# Altium PCB 8SoundsUSB.PcbDoc (part 2 of 3)
Units mm, origin at the board's own origin, x right, y up, seen from the top; angles counter-clockwise.
Board outline 126.1 x 74.1 mm, 4 copper layers (Top Layer, GND PLANE, POWER PLANE, Bottom Layer); 415 components, 227 nets, 1234 pads, 311 vias.
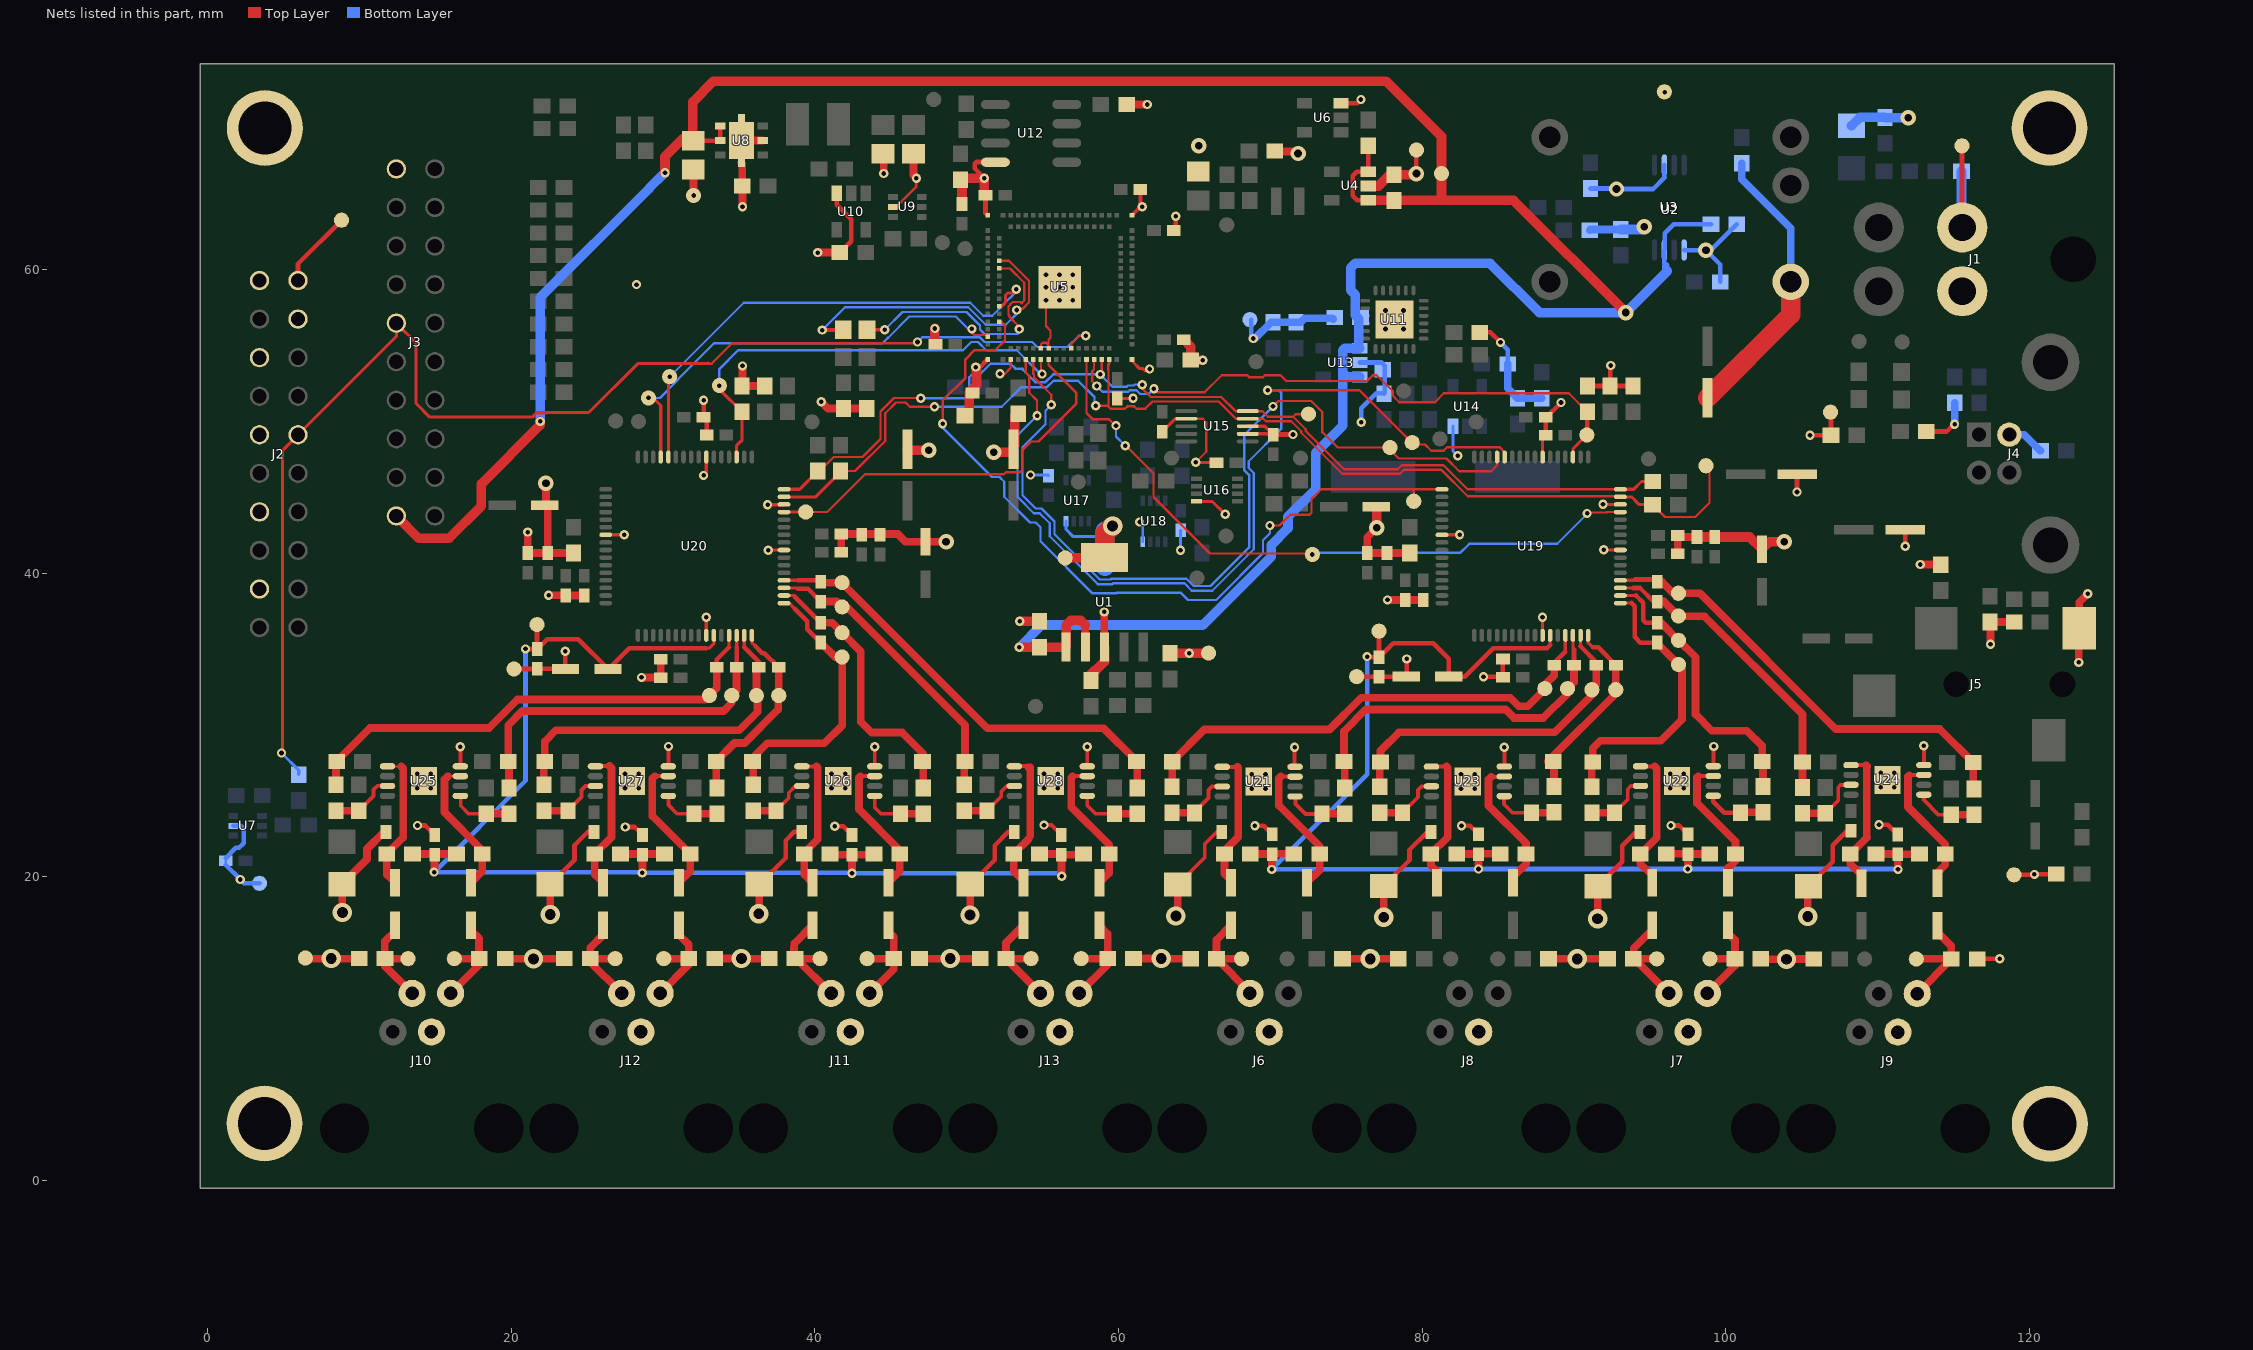
[diagram p4: the nets of this part, all layers, seen from the top]

## Via types
v1: diameter 0.61, hole 0.305, Top Layer to Bottom Layer, 227 vias
v2: diameter 0.406, hole 0.305, Top Layer to Bottom Layer, 32 vias
v3: diameter 1.27, hole 0.711, Top Layer to Bottom Layer, 27 vias
v4: diameter 1.016, hole 0.508, Top Layer to Bottom Layer, 20 vias
v5: diameter 0.66, hole 0.33, Top Layer to Bottom Layer, tented top, 4 vias
v6: diameter 0.61/0.61 (per signal layer), hole 0.305, Top Layer to Bottom Layer, 1 vias

## Nets (pads, with @x,y where several pads share a name; then routed paths per layer and width w, separated by ;. In a path a pad name is that pad's centre, name@x,y a point inside that pad or via, vN(x,y) a via of type N, cw(c..) or ccw(c..) an arc to the next point about the centre after c; other vN are vias at no path point) (continued)
+5V: C1.2 C10.2 C14.2 C30.2 J3.1 R9.1 R13.1 TP44.1 U1.1 U1.2 U3.7 U4.1 U4.3 U8.4 U8.5 U13.1 U13.3 | length 203.8
  Top Layer w0.305: C14.2@31.979,68.514 U8.5@33.746,68.514 ; U8.5@33.752,68.516 U8.4@33.752,69.466 ; U4.1@76.452,64.575 75.735,64.575 75.438,64.872 75.438,66.206 75.707,66.475 U4.3@76.452,66.475 R13.1@76.452,68.175 ; U8.5@33.746,68.514 33.748,68.512 33.757,68.504 U8.5@33.746,68.514
  Top Layer w0.508: U1.2@57.81,35.153 57.81,36.601 ; C14.2@31.979,68.651 32.047,68.583 32.101,68.529 C14.2@31.979,68.651
  Top Layer w0.635: J3.1@12.421,43.79 13.894,42.316 15.9,42.316 18.02,44.436 18.02,45.896 21.895,49.77 v1(21.895,50.013) ; v1(30.124,66.396) 30.124,67.462 31.318,68.656 C14.2@31.953,68.656 ; C14.2@31.953,68.631 C14.2@31.953,68.656 ; C14.2@31.979,68.656 C14.2@31.953,68.656 ; v1(53.467,35.128) 54.775,35.128 C1.2@54.79,35.143 U1.1@56.55,35.143 56.55,36.586 56.871,36.906 57.506,36.906 57.81,36.601 ; U4.1@76.452,64.575 C10.2@78.152,64.575 86.031,64.575 v4(93.421,57.184) ; 81.28,64.575 TP44.1@81.28,66.345 81.28,68.783 77.648,72.415 33.299,72.415 31.953,71.069 C14.2@31.953,68.656
  Bottom Layer w0.254: U3.7@95.965,61.309 U3.7@95.987,61.33
  Bottom Layer w0.305: U3.7@95.965,61.309 95.965,60.422 96.164,60.223 ; U3.7@95.987,61.33 95.987,62.409 96.587,63.009 R9.1@99.04,63.009 ; C30.2@75.84,56.768 75.89,56.718 C30.2@75.84,56.768
  Bottom Layer w0.508: 96.063,59.978 96.063,60.274
  Bottom Layer w0.635: v1(21.895,50.013) 21.895,58.166 29.083,65.354 29.083,65.38 30.099,66.396 v1(30.124,66.396) ; v1(53.467,35.128) 54.94,36.601 65.558,36.601 70.066,41.109 70.066,41.872 71.171,42.977 71.171,43.739 73,45.568 73,47.955 74.778,49.733 74.778,53.196 ; U13.3@75.89,52.943 75.05,52.943 75.04,52.934 74.778,53.196 ; 96.164,59.927 v4(93.421,57.184) 87.723,57.184 84.48,60.427 75.59,60.427 75.298,60.134 75.298,58.661 75.59,58.369 C30.2@75.59,57.018 ; 74.778,53.196 74.778,54.712 74.909,54.843 U13.1@75.89,54.843 75.84,54.893 C30.2@75.84,56.768 ; C30.2@75.59,57.018 C30.2@75.84,56.768 ; C30.2@75.59,57.018 C30.2@75.84,56.768
ADC0_AIN1_N: C93.2 R68.1 R78.1 TP1.1 U19.45 | length 32.9
  Top Layer w0.203: 89.433,34.849 89.433,35.911 U19.45@89.44,35.918
  Top Layer w0.305: C93.2@88.707,33.96 88.69,33.977 88.69,34.106 89.433,34.849
  Top Layer w0.508: R78.1@63.532,25.936 R68.1@63.532,27.592 ; R68.1@63.608,27.592 R68.1@63.532,27.592 ; C93.2@88.707,33.96 88.707,33.274 88.087,32.654 TP1.1@88.087,32.41 88.087,32.37 86.959,31.242 86.37,31.242 85.811,31.801 75.986,31.801 73.903,29.718 65.658,29.718 R68.1@63.532,27.592
ADC0_AIN1_P: C93.1 R70.1 R80.1 TP5.1 U19.46 | length 24
  Top Layer w0.203: U19.46@89.94,35.918 89.94,35.053 90.007,34.986
  Top Layer w0.305: 89.992,35.001 90.007,34.986 C93.1@90.007,33.96
  Top Layer w0.508: R80.1@74.91,25.859 74.91,27.559 R70.1@74.86,27.609 74.86,29.598 76.302,31.039 85.496,31.039 86.055,30.48 87.986,30.48 89.586,32.08 TP5.1@89.586,32.41 90.007,32.832 C93.1@90.007,33.96
ADC0_AIN2_N: C105.2 R84.1 R94.1 TP11.1 U19.47 | length 22.3
  Top Layer w0.203: U19.47@90.44,35.918 90.44,35.2 90.442,35.197
  Top Layer w0.305: 90.442,35.197 90.507,35.133 90.636,35.004 90.701,34.939 91.217,34.423 91.476,34.164 C105.2@91.476,33.96
  Top Layer w0.508: R94.1@77.211,25.934 77.211,27.534 R84.1@77.261,27.584 77.261,28.316 78.486,29.54 88.748,29.54 91.186,31.979 TP11.1@91.186,32.334 91.476,32.624 C105.2@91.476,33.96
ADC0_AIN2_P: C105.1 R86.1 R96.1 TP9.1 U19.48 | length 19.6
  Top Layer w0.203: U19.48@90.943,35.916 U19.48@90.94,35.918 90.94,35.425 91.237,35.128
  Top Layer w0.305: 91.237,35.128 91.607,35.128 C105.1@92.776,33.96
  Top Layer w0.508: R86.1@88.636,27.609 88.686,27.559 R96.1@88.686,25.959 ; R86.1@88.707,27.609 R86.1@88.29,27.609 ; C105.1@92.776,33.96 92.761,33.945 TP9.1@92.761,32.334 TP9.1@92.761,32.08 ; R86.1@88.29,27.609 88.463,27.783 TP9.1@92.761,32.08 ; R86.1@88.29,27.609 TP9.1@92.761,32.08
ADC0_AIN3_N: C94.2 R69.1 R79.1 TP16.1 U19.49 | length 19.6
  Top Layer w0.203: U19.49@93.065,38.043 93.796,38.043 93.802,38.049
  Top Layer w0.305: 93.802,38.049 94.005,37.846 94.005,35.814 94.376,35.443 C94.2@95.49,35.443
  Top Layer w0.508: R79.1@91.187,25.934 R69.1@91.187,27.534 ; R69.1@91.237,27.584 91.237,28.474 91.745,28.981 95.733,28.981 97.13,30.378 97.13,33.754 95.49,35.393 C94.2@95.49,35.443
ADC0_AIN3_P: C94.1 R71.1 R81.1 TP14.1 U19.50 | length 19.2
  Top Layer w0.203: U19.50@93.065,38.543 93.068,38.546 94.096,38.546
  Top Layer w0.305: 94.096,38.546 94.564,38.077 94.564,36.906 94.727,36.743 C94.1@95.49,36.743
  Top Layer w0.508: C94.1@95.49,36.743 95.74,36.743 TP14.1@96.89,35.593 ; TP14.1@97,35.484 TP14.1@96.89,35.593 ; R81.1@102.462,25.959 102.462,27.559 R71.1@102.412,27.609 102.412,28.626 101.397,29.642 99.085,29.642 98.019,30.709 98.019,34.468 96.893,35.593 TP14.1@96.89,35.593
ADC0_AIN4_N: C106.2 R85.1 R95.1 TP21.1 U19.51 | length 20.3
  Top Layer w0.203: U19.51@93.065,39.043 93.069,39.04 93.904,39.04
  Top Layer w0.305: 93.904,39.04 94.361,39.04 95.258,38.143 C106.2@95.49,38.143
  Top Layer w0.508: C106.2@95.49,38.143 95.94,38.143 96.898,37.186 98.603,37.186 105.067,30.722 R85.1@105.067,27.583 105.062,27.578 R95.1@105.062,25.895
ADC0_AIN4_P: C106.1 R87.1 R97.1 TP19.1 U19.52 | length 30
  Top Layer w0.203: U19.52@93.065,39.543 93.07,39.548 93.955,39.548 94.005,39.599
  Top Layer w0.305: 94.005,39.599 95.335,39.599 C106.1@95.49,39.443
  Top Layer w0.508: C106.1@95.49,39.443 95.803,39.443 96.553,38.693 TP19.1@96.89,38.693 98.314,38.693 107.264,29.743 114.113,29.743 R87.1@116.312,27.545 116.312,25.845 R97.1@116.362,25.795
ADC0_SD1: TP4.1 U5.A40 U19.13 | length 57.8
  Top Layer w0.152: U5.A40@54.39,54.093 54.381,54.084 54.381,53.157 54.432,53.106 54.432,52.916 55.575,51.773 v1(55.575,51.105) ; v1(70.18,51.003) 70.536,51.359 72.695,51.359 73.431,50.622 73.431,49.301 74.44,48.293 TP4.1@77.89,48.293 77.89,48.144 78.461,47.574 81.61,47.574 82.448,46.736 84.557,46.736 84.94,47.12 U19.13@84.94,47.668
  Bottom Layer w0.152: v1(55.575,51.105) 55.189,50.718 55.189,49.829 53.67,48.311 53.67,45.151 54.549,44.272 54.93,44.272 55.778,43.424 55.778,42.578 58.758,39.599 59.474,39.599 59.524,39.649 64.473,39.649 64.955,39.167 66.058,39.167 68.605,41.714 68.605,46.49 68.275,46.821 68.275,49.098 v1(70.18,51.003)
ADC0_SD2: TP8.1 U5.A39 U19.12 | length 59.8
  Top Layer w0.152: U5.A39@53.89,54.093 53.89,53.216 54.119,52.988 54.119,51.901 54.559,51.46 54.585,51.46 54.635,51.41 v1(54.635,50.394) ; v1(69.825,52.07) 75.871,52.07 79.325,48.616 TP8.1@79.35,48.616 79.472,48.493 80.19,48.493 80.601,48.082 81.421,48.082 81.661,48.322 85.097,48.322 85.44,47.979 U19.12@85.44,47.668
  Bottom Layer w0.152: v1(54.635,50.394) 53.34,49.098 53.34,45.051 54.423,43.967 54.804,43.967 55.474,43.298 55.474,42.452 58.632,39.294 59.6,39.294 59.651,39.345 64.347,39.345 64.829,38.862 66.184,38.862 68.91,41.588 68.91,46.617 68.58,46.947 68.58,47.389 70.714,49.522 70.714,51.918 70.561,52.07 v1(69.825,52.07)
ADC1_AIN1_N: C117.2 R100.1 R110.1 TP31.1 U20.45 | length 32.4
  Top Layer w0.203: 34.341,35.128 U20.45@34.34,35.918
  Top Layer w0.305: C117.2@33.538,33.807 33.538,34.326 34.341,35.128
  Top Layer w0.508: R110.1@8.44,26.068 R100.1@8.44,27.567 ; R100.1@8.49,27.618 10.692,29.82 18.531,29.82 20.411,31.699 32.791,31.699 33.538,32.446 C117.2@33.538,33.807
ADC1_AIN1_P: C117.1 R102.1 R112.1 TP33.1 U20.46 | length 24
  Top Layer w0.203: U20.46@34.84,35.918 34.849,35.91 34.849,35.154
  Top Layer w0.305: C117.1@34.838,33.807 34.849,33.818 34.849,35.154
  Top Layer w0.508: R102.1@19.79,27.618 19.79,30.001 20.726,30.937 33.985,30.937 34.519,31.471 TP33.1@34.519,31.953 34.838,32.273 C117.1@34.838,33.807 ; R112.1@19.84,25.868 R102.1@19.84,27.531
ADC1_AIN2_N: C129.2 R116.1 R126.1 TP36.1 U20.47 | length 23.2
  Top Layer w0.203: U20.47@35.34,35.918 35.34,35.145 35.357,35.128
  Top Layer w0.305: 35.357,35.128 36.307,34.178 C129.2@36.307,33.807
  Top Layer w0.508: R126.1@22.14,26.068 R116.1@22.14,27.551 ; R116.1@22.19,27.618 22.19,28.921 22.936,29.667 35.001,29.667 36.22,30.886 36.22,31.877 TP36.1@36.144,31.953 36.144,33.645 C129.2@36.307,33.807
ADC1_AIN2_P: C129.1 R118.1 R128.1 TP35.1 U20.48 | length 13.2
  Top Layer w0.203: U20.48@35.84,35.918 35.84,35.435 36.057,35.219
  Top Layer w0.305: 36.057,35.219 36.535,34.741 36.674,34.741 C129.1@37.607,33.807
  Top Layer w0.508: C129.1@37.607,33.807 37.617,33.797 TP35.1@37.617,31.953 37.592,31.928 37.592,31.039 35.382,28.829 34.701,28.829 R118.1@33.49,27.618 R128.1@33.49,25.869 ; R128.1@33.49,25.869 33.516,25.844 33.579,25.781 R128.1@33.49,25.869
ADC1_AIN3_N: C118.2 R101.1 R111.1 TP38.1 U20.49 | length 18.7
  Top Layer w0.203: U20.49@37.965,38.043 38.3,38.043 38.667,37.676
  Top Layer w0.305: 38.667,37.676 39.505,36.838 39.505,36.328 C118.2@40.39,35.443
  Top Layer w0.508: R111.1@35.94,26.068 35.94,27.568 R101.1@35.89,27.618 35.89,27.839 36.855,28.804 40.615,28.804 41.79,29.979 TP38.1@41.79,34.493 41.34,34.493 C118.2@40.39,35.443
ADC1_AIN3_P: C118.1 R103.1 R113.1 TP37.1 U20.50 | length 20.7
  Top Layer w0.203: U20.50@37.965,38.543 38.597,38.543 38.659,38.481
  Top Layer w0.305: 38.659,38.481 38.659,38.475 C118.1@40.39,36.743
  Top Layer w0.508: C118.1@40.39,36.743 41.14,36.743 TP37.1@41.79,36.093 43.028,34.856 43.028,30.226 43.739,29.515 45.745,29.515 47.14,28.12 ; 47.14,28.12 47.14,27.618 R113.1@47.14,25.868 47.14,28.12
ADC1_AIN4_N: C130.2 R117.1 R127.1 TP40.1 U20.51 | length 19.7
  Top Layer w0.203: 38.887,38.989 38.834,39.042 U20.51@38.018,39.042 ; U20.51@38.018,39.042 37.992,39.017 37.965,38.99 U20.51@38.018,39.042
  Top Layer w0.305: 38.887,38.989 39.545,38.989 C130.2@40.39,38.143
  Top Layer w0.508: C130.2@40.39,38.143 41.44,38.143 TP40.1@41.79,37.793 42.09,37.793 49.89,29.993 R117.1@49.89,27.618 49.84,27.568 R127.1@49.84,26.068
ADC1_AIN4_P: C130.1 R119.1 R129.1 TP39.1 U20.52 | length 30
  Top Layer w0.203: U20.52@37.965,39.543 37.97,39.548 38.862,39.548
  Top Layer w0.305: 38.862,39.548 40.286,39.548 C130.1@40.39,39.443
  Top Layer w0.508: C130.1@40.39,39.443 40.44,39.393 TP39.1@41.79,39.393 41.79,39.363 51.359,29.794 59.014,29.794 R119.1@61.19,27.618 61.24,27.568 R129.1@61.24,25.868
ADC1_SD1: TP10.1 U5.A33 U20.13 | length 32.1
  Top Layer w0.152: v1(50.343,56.109) 50.343,55.855 50.495,55.703 51.281,55.703 U5.A33@51.39,55.593
  Top Layer w0.203: U20.13@29.845,47.673 U20.13@29.84,47.668 29.84,51.059 TP10.1@29.464,51.435 ; TP10.1@29.464,51.435 29.032,51.435 28.981,51.435 TP10.1@29.464,51.435
  Bottom Layer w0.152: v1(29.032,51.562) 29.786,51.562 30.963,52.738 30.963,52.781 33.35,55.169 44.45,55.169 44.806,55.524 44.823,55.524 46.22,56.921 49.276,56.921 ; v1(50.343,56.109) v1@50.343,55.859 ; 49.276,56.921 50.216,55.982 v1@50.338,55.859 ; 49.276,56.921 v1@50.338,55.859 ; v1@50.338,55.859 v1@50.343,55.859 ; v1@50.338,55.859 v1@50.343,55.859
ADC1_SD2: TP13.1 U5.B24 U20.12 | length 38.8
  Top Layer w0.203: U5.B24@52.14,57.593 52.3,57.593 52.544,57.838 52.544,58.312 52.703,58.471 53.177,58.471 53.264,58.557 v1(53.264,58.725) ; TP13.1@30.34,52.997 30.34,52.959 U20.12@30.34,47.668 TP13.1@30.34,52.997 ; TP13.1@30.34,52.997 30.366,53.023 30.404,53.061 TP13.1@30.34,52.997
  Bottom Layer w0.152: v1(30.429,52.959) 35.306,57.836 50.232,57.836 51.096,56.972 51.679,56.972 52.527,57.821 52.527,57.828 52.84,58.141 52.847,58.141 53.264,58.557 v1(53.264,58.725)
C0_AN1_1_N: C89.2 J6.2 R72.2 TP66.1 | length 7.4
  Top Layer w0.508: C89.2@67.41,16.809 66.46,15.859 R72.2@66.46,14.609 ; TP66.1@68.11,14.609 R72.2@66.46,14.609 ; J6.2@68.66,12.333 68.66,12.409 R72.2@66.46,14.609
C0_AN1_2_N: C89.1 R73.2 U21.5 | length 9.2
  Top Layer w0.254: U21.5@66.835,27.259 66.84,27.254 67.843,27.254
  Top Layer w0.508: C89.1@67.41,19.609 67.41,19.778 66.982,20.206 R73.2@66.982,21.523 66.982,21.72 67.894,22.631 67.894,27.203 67.843,27.254
C0_AN1_2_P: C95.1 R76.1 U21.3 | length 9.5
  Top Layer w0.254: 70.688,26.619 70.698,26.609 U21.3@71.635,26.609
  Top Layer w0.508: 70.688,26.619 70.561,26.492 70.561,24.714 73.254,22.021 73.254,20.453 C95.1@72.41,19.609
C0_AN1_3_N: C87.1 R78.2 U21.7 | length 5.7
  Top Layer w0.254: U21.7@66.835,25.959 66.167,25.959 65.938,25.73 65.938,25.191 ; 65.938,25.191 64.983,24.236 65.938,25.191
  Top Layer w0.508: R78.2@63.532,24.236 64.983,24.236 C87.1@65.01,24.209
C0_AN1_3_P: C85.1 R80.2 U21.1 | length 4
  Top Layer w0.254: U21.1@71.635,25.309 71.653,25.291 71.653,24.816 72.31,24.159 C85.1@73.41,24.159
  Top Layer w0.508: C85.1@73.41,24.159 R80.2@74.91,24.159
C0_AN2_2_N: C101.1 R89.2 U23.5 | length 9.3
  Top Layer w0.254: U23.5@80.618,27.27 80.628,27.28 81.61,27.28
  Top Layer w0.508: C101.1@80.986,19.609 80.986,20.36 80.582,20.764 R89.2@80.582,21.523 81.686,22.627 81.686,27.203 81.61,27.28
C0_AN2_2_P: C107.1 R92.1 U23.3 | length 9.3
  Top Layer w0.254: 84.557,26.594 85.392,26.594 U23.3@85.418,26.62
  Top Layer w0.508: 84.557,26.594 84.379,26.416 84.379,24.689 86.854,22.213 R92.1@86.854,21.523 86.868,21.51 86.868,20.879 85.986,19.997 C107.1@85.986,19.609
C0_AN2_3_N: C99.1 R94.2 U23.7 | length 4.4
  Top Layer w0.254: C99.1@78.711,24.234 79.731,25.253 79.731,25.73 79.971,25.97 U23.7@80.618,25.97
  Top Layer w0.508: R94.2@77.211,24.234 C99.1@78.711,24.234
C0_AN2_3_P: C97.1 R96.2 U23.1 | length 4.1
  Top Layer w0.254: U23.1@85.418,25.32 85.395,25.297 85.395,24.79 85.951,24.234 C97.1@87.211,24.234
  Top Layer w0.508: C97.1@87.211,24.234 88.661,24.234 R96.2@88.686,24.259
C0_AN3_1_N: C90.2 J7.2 R74.2 TP67.1 | length 7.6
  Top Layer w0.508: C90.2@95.162,16.809 95.162,16.524 93.948,15.31 93.948,14.645 R74.2@93.912,14.609 ; TP67.1@95.462,14.609 R74.2@93.912,14.609 ; J7.2@96.26,12.333 93.984,14.609 R74.2@93.912,14.609
C0_AN3_1_P: C96.2 J7.4 R83.2 TP69.1 | length 7.1
  Top Layer w0.508: J7.4@98.8,12.333 100.612,14.145 R83.2@100.612,14.609 ; TP69.1@98.962,14.609 R83.2@100.612,14.609 ; C96.2@100.162,16.809 100.162,16.297 100.612,15.847 R83.2@100.612,14.609
C0_AN3_2_N: C90.1 R75.2 U22.5 | length 9.4
  Top Layer w0.254: U22.5@94.409,27.28 95.326,27.28
  Top Layer w0.508: C90.1@95.162,19.609 95.162,20.103 94.382,20.883 R75.2@94.382,21.523 94.396,21.523 95.453,22.581 95.453,27.153 95.326,27.28
C0_AN3_2_P: C96.1 R77.1 U22.3 | length 9.3
  Top Layer w0.254: 98.196,26.645 99.189,26.645 U22.3@99.191,26.647
  Top Layer w0.508: 98.196,26.645 98.12,26.568 98.12,24.867 100.654,22.332 R77.1@100.654,21.523 100.654,21.076 100.162,20.584 C96.1@100.162,19.609
C0_AN3_3_N: C88.1 R79.2 U22.7 | length 4.3
  Top Layer w0.254: C88.1@92.687,24.234 93.548,25.095 93.548,25.781 93.751,25.984 94.378,25.984 U22.7@94.391,25.997
  Top Layer w0.508: R79.2@91.187,24.234 C88.1@92.687,24.234
C0_AN3_3_P: C86.1 R81.2 U22.1 | length 4
  Top Layer w0.305: U22.1@99.191,25.347 99.191,24.964 99.921,24.234 C86.1@100.987,24.234
  Top Layer w0.508: C86.1@100.987,24.234 101.012,24.259 R81.2@102.462,24.259
C0_AN4_1_P: C108.2 J9.4 R99.2 TP73.1 | length 8.1
  Top Layer w0.508: TP73.1@112.562,14.595 112.572,14.605 R99.2@114.872,14.605 ; J9.4@112.624,12.319 114.872,14.568 R99.2@114.872,14.605 ; C108.2@113.962,16.795 113.962,16.366 114.872,15.455 R99.2@114.872,14.605
C0_AN4_2_N: C102.1 R91.2 U24.5 | length 9.6
  Top Layer w0.254: U24.5@108.262,27.37 U24.5@108.276,27.356 ; U24.5@108.276,27.381 109.245,27.381
  Top Layer w0.508: C102.1@108.962,19.595 108.962,20.121 108.204,20.879 108.204,21.507 R91.2@108.206,21.509 109.322,22.625 ; 109.245,27.356 109.322,27.28 ; 109.296,22.625 109.296,27.28
C0_AN4_2_P: C108.1 R93.1 U24.3 | length 9.3
  Top Layer w0.254: 112.09,26.721 U24.3@113.037,26.721 ; U24.3@113.037,26.695 U24.3@113.062,26.72
  Top Layer w0.508: 112.09,26.695 112.014,26.619 112.014,24.613 114.478,22.149 R93.1@114.478,21.509 114.478,20.803 113.962,20.286 C108.1@113.962,19.595
C0_AN4_3_N: C100.1 R95.2 U24.7 | length 4.5
  Top Layer w0.254: C100.1@106.562,24.195 107.417,25.05 107.417,25.908 107.579,26.07 U24.7@108.262,26.07
  Top Layer w0.508: R95.2@105.062,24.195 C100.1@106.562,24.195
C0_AN4_3_P: C98.1 R97.2 U24.1 | length 4.1
  Top Layer w0.254: U24.1@113.062,25.42 113.062,25.127 113.03,25.095 114.03,24.095 C98.1@114.862,24.095
  Top Layer w0.508: C98.1@114.862,24.095 R97.2@116.362,24.095
C1_AN1_1_N: C113.2 J10.2 R104.2 TP74.1 | length 9
  Top Layer w0.508: R104.2@11.709,14.63 11.723,14.617 TP74.1@13.193,14.617 ; J10.2@13.46,12.333 R104.2@11.659,14.135 ; R104.2@11.659,14.135 11.659,14.618 11.659,15.748 ; R104.2@11.659,14.135 11.659,14.63 11.659,15.748 ; 11.659,15.748 C113.2@12.37,16.459 ; C113.2@12.37,16.459 12.37,16.818 12.37,16.84 C113.2@12.37,16.459
C1_AN1_1_P: C119.2 J10.4 R114.2 TP76.1 | length 9
  Top Layer w0.508: J10.4@16,12.333 17.907,14.24 R114.2@17.907,14.58 ; TP76.1@16.24,14.618 R114.2@17.868,14.618 ; C119.2@17.348,16.866 C119.2@17.323,16.84 ; R114.2@17.932,14.605 17.919,14.618 R114.2@17.89,14.618 R114.2@17.868,14.618 ; C119.2@17.323,16.497 17.868,15.951 ; C119.2@17.323,16.497 17.323,16.818 C119.2@17.323,16.84 ; C119.2@17.323,16.497 C119.2@17.323,16.84 ; R114.2@17.868,14.618 17.868,15.951 ; R114.2@17.868,14.618 17.879,14.607 R114.2@17.907,14.58 ; R114.2@17.868,14.618 17.868,15.951 ; R114.2@17.868,14.618 R114.2@17.907,14.58
C1_AN1_2_N: C113.1 R105.2 U25.5 | length 10.2
  Top Layer w0.152: U25.5@11.836,27.28 11.84,27.28 12.751,27.28 U25.5@11.836,27.28
  Top Layer w0.508: C113.1@12.34,19.618 11.79,20.168 R105.2@11.79,21.518 12.878,22.606 12.878,27.153 12.751,27.28
C1_AN1_2_P: C119.1 R108.1 U25.3 | length 9.4
  Top Layer w0.152: 15.824,26.645 U25.3@16.586,26.645 ; U25.3@16.586,26.645 16.614,26.617 16.637,26.594 U25.3@16.586,26.645
  Top Layer w0.508: 15.824,26.645 15.596,26.416 15.596,24.257 18.09,21.762 R108.1@18.09,21.518 18.09,20.368 C119.1@17.34,19.618
C1_AN1_3_N: C111.1 R110.2 U25.7 | length 4.3
  Top Layer w0.254: C111.1@9.957,24.359 10.922,25.324 10.922,25.756 11.176,26.01 U25.7@11.836,26.01 ; U25.7@11.806,25.959 U25.7@11.84,25.993
  Top Layer w0.508: R110.2@8.44,24.368 C111.1@9.922,24.368
C1_AN1_3_P: C109.1 R112.2 U25.1 | length 4
  Top Layer w0.254: U25.1@16.662,25.273 16.662,24.689 17.183,24.168 C109.1@18.34,24.168
  Top Layer w0.508: C109.1@18.34,24.168 R112.2@19.84,24.168 R112.2@19.901,24.168
C1_AN2_1_N: C125.2 J12.2 R120.2 TP78.1 | length 7.1
  Top Layer w0.508: R120.2@25.171,14.422 J12.2@27.26,12.333 ; R120.2@25.184,14.618 R120.2@25.19,14.618 ; C125.2@26.035,16.789 26.035,16.18 25.19,15.335 R120.2@25.19,14.618 ; TP78.1@26.84,14.618 R120.2@25.19,14.618
C1_AN2_1_P: C131.2 J12.4 R130.2 TP80.1 | length 6.8
  Top Layer w0.508: J12.4@29.8,12.333 R130.2@31.699,14.232 ; TP80.1@30.04,14.618 R130.2@31.687,14.618 ; C131.2@31.04,16.818 31.04,16.204 31.69,15.554 31.69,15.316 R130.2@31.69,14.618
C1_AN2_2_N: C125.1 R121.2 U27.5 | length 9.3
  Top Layer w0.254: U27.5@25.629,27.305 26.467,27.305
  Top Layer w0.508: C125.1@26.04,19.618 25.49,20.168 R121.2@25.49,21.518 26.594,22.622 26.594,27.178 26.467,27.305
C1_AN2_2_P: C131.1 R124.1 U27.3 | length 9.3
  Top Layer w0.254: 29.439,26.645 29.44,26.643 U27.3@30.34,26.643
  Top Layer w0.508: 29.439,26.645 29.286,26.492 29.286,24.022 R124.1@31.79,21.518 31.79,20.368 C131.1@31.04,19.618 C131.1@31.047,19.625
C1_AN2_3_N: C123.1 R126.2 U27.7 | length 5.7
  Top Layer w0.254: U27.7@25.54,25.993 24.876,25.993 24.613,25.73 24.613,25.273 ; 24.613,25.273 23.724,24.385 24.613,25.273
  Top Layer w0.508: R126.2@22.14,24.368 C123.1@23.74,24.368 C123.1@23.816,24.368
C1_AN2_3_P: C121.1 R128.2 U27.1 | length 4.1
  Top Layer w0.254: U27.1@30.34,25.343 30.353,25.331 30.353,24.74 30.924,24.168 C121.1@32.04,24.168
  Top Layer w0.508: C121.1@32.04,24.168 R128.2@33.54,24.168 33.591,24.168 R128.2@33.604,24.155
C1_AN3_1_N: C114.2 J11.2 R106.2 TP75.1 | length 8.8
  Top Layer w0.508: R106.2@38.633,15.005 38.633,15.611 C114.2@39.84,16.818 ; TP75.1@40.34,14.618 R106.2@38.775,14.618 ; J11.2@41.06,12.333 R106.2@38.775,14.618 ; R106.2@38.615,14.618 38.615,15.39 R106.2@38.615,14.618 ; R106.2@38.615,14.618 R106.2@38.775,14.618
C1_AN3_1_P: C120.2 J11.4 R115.2 TP77.1 | length 7
  Top Layer w0.508: TP77.1@43.44,14.618 R115.2@45.19,14.618 ; J11.4@43.6,12.333 45.19,13.923 R115.2@45.19,14.618 ; C120.2@44.84,16.818 44.84,16.399 45.19,16.049 R115.2@45.19,14.618
C1_AN3_2_N: C114.1 R107.2 U26.5 | length 9.2
  Top Layer w0.254: U26.5@39.154,27.28 40.107,27.28
  Top Layer w0.508: C114.1@39.84,19.618 39.29,20.168 R107.2@39.29,21.518 39.29,21.587 40.183,22.479 40.183,27.203 40.107,27.28
C1_AN3_2_P: C120.1 R109.1 U26.3 | length 9.5
  Top Layer w0.254: 42.901,26.543 43.001,26.643 U26.3@43.94,26.643
  Top Layer w0.508: 42.977,26.619 42.901,26.543 42.901,24.46 45.59,21.77 R109.1@45.59,21.518 45.59,20.368 C120.1@44.84,19.618
C1_AN3_3_N: C112.1 R111.2 U26.7 | length 4.1
  Top Layer w0.254: C112.1@37.44,24.368 38.278,25.206 38.278,25.552 38.719,25.993 U26.7@39.14,25.993
  Top Layer w0.508: R111.2@35.94,24.368 C112.1@37.44,24.368
C1_AN3_3_P: C110.1 R113.2 U26.1 | length 4.1
  Top Layer w0.254: U26.1@43.94,25.343 43.94,24.589 44.361,24.168 C110.1@45.64,24.168
  Top Layer w0.508: C110.1@45.64,24.168 R113.2@47.14,24.168
C1_AN4_1_N: C126.2 J13.2 R122.2 TP79.1 | length 7.6
  Top Layer w0.508: C126.2@53.74,16.818 52.59,15.668 R122.2@52.59,14.603 ; TP79.1@54.24,14.618 R122.2@52.605,14.618 ; J13.2@54.86,12.333 R122.2@52.59,14.603 ; R122.2@52.59,14.603 52.598,14.611 R122.2@52.605,14.618 ; R122.2@52.59,14.603 R122.2@52.605,14.618
C1_AN4_1_P: C132.2 J13.4 R131.2 TP81.1 | length 8.1
  Top Layer w0.508: J13.4@57.4,12.333 59.29,14.223 R131.2@59.29,14.618 ; TP81.1@57.54,14.618 R131.2@59.29,14.618 ; C132.2@58.74,16.818 C132.2@58.725,16.803 ; C132.2@58.725,16.803 59.29,16.237 ; C132.2@58.725,16.803 59.29,16.237 ; R131.2@59.29,14.618 59.29,16.237
C1_AN4_2_N: C126.1 R123.2 U28.5 | length 9.1
  Top Layer w0.254: U28.5@53.14,27.293 53.152,27.305 54,27.305
  Top Layer w0.508: C126.1@53.74,19.618 53.74,19.742 53.09,20.392 R123.2@53.09,21.518 54.077,22.504 ; 54.077,27.229 54.178,27.229 54.178,22.708
C1_AN4_2_P: C132.1 R125.1 U28.3 | length 9.3
  Top Layer w0.254: 56.972,26.619 56.996,26.643 U28.3@57.94,26.643
  Top Layer w0.508: 56.972,26.619 56.896,26.543 56.896,24.613 59.39,22.118 R125.1@59.39,21.518 59.39,20.268 C132.1@58.74,19.618
C1_AN4_3_N: C124.1 R127.2 U28.7 | length 4.2
  Top Layer w0.254: C124.1@51.34,24.368 52.273,25.301 52.273,25.629 52.638,25.993 U28.7@53.14,25.993
  Top Layer w0.508: R127.2@49.84,24.368 C124.1@51.34,24.368
C1_AN4_3_P: C122.1 R129.2 U28.1 | length 4.2
  Top Layer w0.254: U28.1@57.94,25.343 57.937,25.34 57.937,24.714 58.483,24.168 C122.1@59.74,24.168
  Top Layer w0.508: C122.1@59.74,24.168 R129.2@61.24,24.168
CODEC0_INT: TP12.1 U5.A47 U19.61 | length 55.3
  Top Layer w0.152: U5.A47@57.887,54.089 U5.A47@57.89,54.093 57.89,50.568 58.293,50.165 59.36,50.165 v1@59.792,49.733 ; v1(59.837,49.738) v1@59.842,49.733 ; v1(60.452,48.412) 60.494,48.412 62.306,46.601 62.306,45.034 66.033,41.307 TP12.1@72.651,41.307 ; v1(72.771,41.25) TP12.1@72.771,41.427 ; v1(90.873,43.955) 90.873,43.959 90.957,44.044 90.983,44.044 91.008,44.018 92.144,44.018 92.169,44.043 U19.61@93.065,44.043 ; v1@59.792,49.733 59.837,49.733 v1@59.842,49.733 ; v1@59.792,49.733 v1@59.842,49.733 ; TP12.1@72.651,41.307 72.682,41.338 TP12.1@72.771,41.427 ; TP12.1@72.651,41.307 TP12.1@72.771,41.427
  Bottom Layer w0.152: v1(59.837,49.738) 59.837,49.027 v1(60.452,48.412) ; v1(72.771,41.25) v1@72.771,41.351 ; v1(90.873,43.955) 90.881,43.947 90.881,43.929 88.913,41.961 83.116,41.961 82.507,41.351 ; v1@72.771,41.351 82.507,41.351 ; v1@72.771,41.351 82.507,41.351
CODEC0_RSTN: R61.2 TP15.1 U5.A48 U19.3 | length 40.8
  Top Layer w0.152: U5.A48@58.39,54.093 58.39,53.455 58.268,53.332 58.268,52.654 v1(58.572,52.349) ; v1(62.332,52.172) 62.572,51.931 65.673,51.931 66.802,53.061 68.49,53.061 68.635,52.916 69.491,52.916 69.635,53.061 70.671,53.061 71.052,52.68 76.379,52.68 76.76,53.061 77.012,53.061 78.062,52.01 78.062,51.717 78.497,51.283 80.848,51.283 81.432,51.867 89.667,51.867 R61.2@90.89,50.643
  Top Layer w0.203: U19.3@89.94,47.668 89.94,48.208 TP15.1@90.856,49.124
  Top Layer w0.305: TP15.1@90.856,49.124 90.89,49.158 R61.2@90.89,50.643
  Bottom Layer w0.152: v1(58.572,52.349) 58.953,51.968 60.637,51.968 60.739,52.07 61.181,52.07 61.435,51.816 61.976,51.816 v1(62.332,52.172) v1@62.306,52.146
CODEC0_VQ: C61.1 C62.2 C91.2 C92.2 C103.2 C104.2 R73.1 R75.1 R76.2 R77.2 R89.1 R91.1 R92.2 R93.2 TP24.1 U19.43 | length 92
  Top Layer w0.203: 88.443,35.281 U19.43@88.443,35.89
  Top Layer w0.305: v1(76.378,34.519) 76.414,34.483 C62.2@77.165,34.483 TP24.1@77.165,36.22 ; 88.443,35.281 88.234,35.072 84.678,35.072 82.804,33.198 C61.1@81.766,33.198 81.766,34.389 80.747,35.408 78.105,35.408 ; 78.105,35.408 77.173,34.475 77.165,34.468 78.105,35.408
  Top Layer w0.508: R73.1@68.682,21.523 68.697,21.508 C91.2@70.118,21.508 ; v1(70.104,20.498) 70.118,20.512 C91.2@70.118,21.508 ; R76.2@71.554,21.523 70.133,21.523 C91.2@70.118,21.508 ; R89.1@82.282,21.523 82.297,21.508 C103.2@83.718,21.508 ; v1(83.718,20.523) C103.2@83.718,21.508 ; R92.2@85.154,21.523 83.733,21.523 C103.2@83.718,21.508 ; R75.1@96.082,21.523 97.503,21.523 C92.2@97.518,21.508 ; v1(97.511,20.523) 97.518,20.531 C92.2@97.518,21.508 ; R77.2@98.954,21.523 98.939,21.508 C92.2@97.518,21.508 ; R91.1@109.906,21.509 111.327,21.509 C104.2@111.342,21.494 ; v1(111.354,20.498) 111.342,20.51 C104.2@111.342,21.494 ; R93.2@112.778,21.509 112.763,21.494 C104.2@111.342,21.494
  Bottom Layer w0.305: v1(76.378,34.519) 76.378,26.772 v1(70.104,20.498) 83.693,20.498 v1(83.718,20.523) v1(97.511,20.523) 111.328,20.523 v1(111.354,20.498)
CODEC1_INT: TP17.1 U5.A42 U20.61 | length 26.6
  Top Layer w0.152: TP17.1@39.395,44.044 40.818,44.044 43.307,46.533 52.451,46.533 52.582,46.665 53.51,46.665 53.644,46.799 53.644,48.099 54.237,48.692 54.729,48.692 57.226,51.189 57.226,51.889 55.39,53.725 U5.A42@55.39,54.093
  Top Layer w0.203: U20.61@37.965,44.043 TP17.1@39.395,44.044
CODEC1_RSTN: R67.2 TP20.1 U5.A41 U20.3 | length 31.6
  Top Layer w0.152: U5.A41@54.89,54.093 U5.A41@54.889,54.092 ; v1(54.966,53.137) 54.915,53.137 v1@54.889,53.111 ; v1@54.889,53.111 54.889,53.137 U5.A41@54.889,54.092 ; v1@54.889,53.111 U5.A41@54.889,54.092
  Top Layer w0.203: v1(33.706,52.375) 33.706,52.128 R67.2@35.19,50.643 35.19,48.754 35.179,48.743 35.149,48.743 34.84,48.434 U20.3@34.84,47.668
  Bottom Layer w0.152: v1(33.706,52.375) 33.706,53.467 34.938,54.699 49.754,54.699 50.3,55.246 50.742,55.246 51.289,54.699 53.302,54.699 v1@54.889,53.111 ; v1@54.831,53.053 v1@54.889,53.111 ; v1(54.966,53.137) 54.915,53.137 v1@54.889,53.111
CODEC1_VQ: C79.1 C80.2 C115.2 C116.2 C127.2 C128.2 R105.1 R107.1 R108.2 R109.2 R121.1 R123.1 R124.2 R125.2 TP42.1 U20.43 | length 99.4
  Top Layer w0.203: 32.842,35.077 33.045,35.077 33.34,35.372 U20.43@33.34,35.918
  Top Layer w0.305: v1(20.93,35.027) 20.94,35.016 C80.2@21.717,35.016 ; TP42.1@21.692,36.627 21.692,35.042 C80.2@21.717,35.016 ; C79.1@26.368,33.706 24.412,35.662 22.362,35.662 C80.2@21.717,35.016 ; 32.842,35.077 27.762,35.077 ; 27.762,35.077 26.379,33.695 26.365,33.68 27.762,35.077
  Top Layer w0.508: v1(14.91,20.32) 14.94,20.351 C115.2@14.94,21.468 ; v1(28.626,20.269) 28.64,20.284 C127.2@28.64,21.468 ; R124.2@30.09,21.518 R124.2@30.086,21.514 ; R107.1@40.99,21.518 41.04,21.468 C116.2@42.44,21.468 ; v1(42.443,20.244) 42.44,20.247 C116.2@42.44,21.468 ; R109.2@43.89,21.518 43.84,21.468 C116.2@42.44,21.468 ; R123.1@54.79,21.518 56.19,21.518 C128.2@56.24,21.468 ; v1(56.261,20.041) 56.24,20.061 C128.2@56.24,21.468 ; R125.2@57.69,21.518 57.64,21.468 C128.2@56.24,21.468 ; R124.2@30.086,21.514 28.64,21.514 27.19,21.514 27.178,21.514 R124.2@30.086,21.514 ; R105.1@13.49,21.518 14.94,21.518 16.337,21.518 R105.1@13.49,21.518
  Bottom Layer w0.305: v1(20.93,35.027) 20.93,26.34 v1(14.91,20.32) 28.575,20.32 v1(28.626,20.269) 42.418,20.269 v1(42.443,20.244) 56.058,20.244 v1(56.261,20.041)
DAC_SD1: TP18.1 U5.B26 U19.17 | length 53.7
  Top Layer w0.152: v1(48.412,49.86) 48.412,51.384 49.911,52.883 49.911,54.102 50.521,54.712 51.883,54.712 52.521,55.351 52.521,56.335 52.264,56.593 U5.B26@52.14,56.593 ; v1(69.977,43.155) 70.606,43.155 71.075,43.624 ; 71.011,43.56 71.075,43.624 ; TP18.1@79.451,44.755 79.451,45.543 ; U19.17@81.315,45.543 79.451,45.543 ; 71.075,43.624 71.316,43.865 72.585,43.865 72.719,43.999 72.719,44.901 73.361,45.543 79.451,45.543
  Bottom Layer w0.152: v1(48.412,49.86) 48.412,49.607 51.664,46.355 52.164,46.355 52.476,46.043 52.476,45.052 54.171,43.358 54.552,43.358 54.864,43.045 54.864,42.114 58.294,38.684 59.852,38.684 59.903,38.735 64.094,38.735 64.577,38.252 66.436,38.252 69.52,41.336 69.52,42.19 69.977,42.647 v1(69.977,43.155)
DEBUG: J2.11 J3.11 R17.1 U5.B37 | length 87.9
  Top Layer w0.152: 32.944,53.823 33.198,53.823 34.544,55.169 46.685,55.169 v1(46.761,55.245) ; U5.B37@56.89,54.843 56.89,55.112 57.429,55.651 v1(57.836,55.651)
  Top Layer w0.203: v1(4.851,28.169) 4.928,28.245 4.928,48.118 J2.11@5.944,49.134 12.421,55.611 J3.11@12.421,56.49 13.716,55.194 13.716,51.206 14.63,50.292 21.366,50.292 21.658,50.584 22.339,50.584 22.352,50.597 25.095,50.597 28.321,53.823 32.944,53.823 32.969,53.848
  Bottom Layer w0.152: v1(46.761,55.245) 47.067,55.55 50.868,55.55 51.174,55.245 54.314,55.245 54.644,54.915 56.642,54.915 57.379,55.651 v1(57.836,55.651)
  Bottom Layer w0.203: v1(4.851,28.169) 5.99,27.03 R17.1@5.99,26.743
GND: C1.1 C3.1 C4.2 C5.1 C6.1 C7.1 C8.1 C9.1 C10.1 C12.1 C13.1 C14.1 C15.1 C16.1 C17.1 C18.1 C19.1 C20.1 C21.1 C22.1 C23.1 C24.1 C25.1 C26.1 C27.1 C28.1 C29.1 C30.1 C31.1 C32.1 C33.1 C34.1 C35.1 C36.1 C37.1 C38.1 C39.1 C40.1 C41.1 C42.1 C43.1 C44.1 C45.2 C46.2 C47.1 C48.1 C49.1 C50.1 C51.1 C52.1 C53.1 C54.1 C55.1 C56.1 C58.1 C60.1 C61.2 C62.1 C63.1 C64.2 C65.2 C66.1 C67.2 C68.2 C69.1 C70.1 C71.1 C72.1 C73.1 C74.1 C75.1 C76.1 C77.1 C78.1 C79.2 C80.1 C81.1 C82.2 C83.2 C84.1 C91.1 C92.1 C103.1 C104.1 C115.1 C116.1 C127.1 C128.1 C133.1 C134.1 C135.1 C136.1 C137.1 C138.1 C139.1 C140.1 C141.1 C142.1 C143.1 C144.1 C145.1 C146.1 C147.1 C148.1 J1.3 J1.4 J2.4 J2.8 J2.12 J2.16 J2.17 J2.19 J2.20 J3.19 J4.4 J5.1 J6.3 J7.3 J8.3 J9.3 J10.3 J11.3 J12.3 J13.3 MTH1.1 MTH2.1 MTH3.1 MTH4.1 R1.2 R3.2 R5.1 R6.1 R7.2 R8.2 R9.2 R12.2 R18.2 R22.2 R23.2 R38.1 R39.1 R53.2 R55.2 R56.2 R59.1 R60.1 R61.1 R62.2 R66.1 R67.1 R72.1 R74.1 R82.1 R83.1 R88.1 R90.1 R98.1 R99.1 R104.1 R106.1 R114.1 R115.1 R120.1 R122.1 R130.1 R131.1 TP45.1 TP46.1 TP47.1 TP48.1 TP49.1 TP50.1 TP51.1 TP52.1 TP53.1 TP55.1 TP56.1 TP57.1 TP58.1 TP59.1 TP60.1 U1.3 U1.6 U2.1 U3.2 U3.5 U4.2 U5.A1 U5.A18 U5.A35 U5.A37 U5.A52 U5.B33 U5.B34 U5.PAD U6.3 U7.2 U8.2 U8.7 U9.2 U10.3 U11.25 U12.4 U13.2 U14.3 U15.2 U15.7 U15.8 U16.4 U17.4 U18.4 U19.7 U19.23 U19.42 U19.56 U19.62 U20.7 U20.23 U20.42 U20.56 U20.62 U21.4 U21.9 U22.4 U22.9 U23.4 U23.9 U24.4 U24.9 U25.4 U25.9 U26.4 U26.9 U27.4 U27.9 U28.4 U28.9 | length 426.6
  Top Layer w0.152: U9.2@45.14,64.143 45.339,64.143 46.685,65.49 v1(46.685,66.04) ; v1(52.197,53.162) 52.248,53.111 52.476,53.111 52.89,53.525 U5.A37@52.89,54.093 ; U5.B33@54.89,54.843 54.89,55.094 54.991,55.194 55.245,55.194 55.39,55.049 ; U5.B34@55.39,54.843 55.39,55.049 ; U15.2@64.465,50.193 65.555,50.193 65.786,49.962 65.786,48.01 v1(65.097,47.32) ; U5.PAD@55.22,57.922 55.22,56.294 55.524,55.989 55.524,55.532 55.39,55.398 55.39,55.049 ; U5.PAD@55.22,57.922 55.264,57.967 56.128,58.831 U5.PAD@56.14,58.843 U5.PAD@55.22,57.922
  Top Layer w0.203: U20.23@26.215,42.543 26.217,42.545 v1(27.432,42.545) ; v1(32.664,46.457) 32.84,46.633 U20.7@32.84,47.668 ; C71.1@32.84,49.096 C71.1@32.863,49.119 ; U20.42@32.842,35.92 v1(32.842,37.109) ; v1(36.881,44.526) 37.948,44.526 U20.62@37.965,44.543 ; v1(36.932,41.529) 37.951,41.529 U20.56@37.965,41.543 ; C22.1@59.919,51.522 59.929,51.511 v1@60.935,51.511 ; U5.A52@60.89,54.093 60.89,53.994 61.392,53.492 61.597,53.492 61.748,53.341 61.776,53.369 62.03,53.369 62.049,53.388 v1(62.049,53.465) ; v1(60.96,51.537) 60.96,51.41 v1@60.96,51.486 ; C40.1@62.89,49.343 63.74,50.193 U15.2@64.465,50.193 ; v1@65.122,47.346 v1(65.097,47.32) 66.426,47.32 C41.1@66.453,47.293 ; U16.4@65.14,44.743 66.179,44.743 v1(67.031,43.891) ; C41.1@66.553,47.32 C41.1@66.58,47.293 ; U15.7@68.515,49.193 68.522,49.2 69.774,49.2 69.83,49.143 C36.1@70.19,49.143 69.64,49.693 U15.8@68.515,49.693 ; U19.23@81.315,42.543 81.317,42.545 v1(82.474,42.545) ; U19.7@87.94,47.668 87.94,48.893 C49.1@88.14,49.093 ; v1(91.923,44.552) 93.057,44.552 U19.62@93.065,44.543 ; v1(91.973,41.554) 93.054,41.554 U19.56@93.065,41.543 ; v1@60.935,51.511 v1@60.96,51.486 ; v1@60.935,51.511 v1@60.96,51.486 ; U19.42@87.935,35.865 87.935,35.918 v1(87.935,37.109) U19.42@87.935,35.865
  Top Layer w0.254: v1(16.637,28.575) 16.637,27.297 U25.4@16.64,27.293 ; U27.4@30.34,27.293 30.353,27.306 v1(30.353,28.6) ; U26.4@43.942,27.295 v1(43.942,28.575) ; v1(55.093,23.419) 55.59,23.419 C128.1@56.24,22.768 ; v1(57.937,28.575) 57.937,27.296 U28.4@57.94,27.293 ; U5.A1@60.89,63.593 61.458,64.16 v1(61.57,64.16) v1@61.443,64.287 ; C133.1@63.91,19.509 65.684,21.283 65.684,22.174 66.469,22.959 C137.1@66.81,22.959 ; v1(71.603,28.55) 71.603,27.292 U21.4@71.635,27.259 ; U23.4@85.418,27.27 85.42,27.272 v6@85.42,28.575 ; v3(90.221,14.605) v3@90.225,14.609 ; U22.4@99.212,27.318 v1(99.212,28.6) ; v1@113.055,28.702 v1@113.062,28.696 ; v1@61.443,64.287 61.443,65.293 61.443,65.303 v1@61.443,64.287 ; v1@113.062,28.696 113.062,28.651 U24.4@113.062,27.37 v1@113.062,28.696
  Top Layer w0.305: J2.19@5.944,59.294 5.944,60.401 TP58.1@8.814,63.271 ; v1(13.818,23.393) 14.326,23.393 ; TP49.1@20.168,33.706 21.707,33.706 C80.1@21.717,33.716 C79.2@23.558,33.716 ; C142.1@22.555,19.507 24.155,21.107 24.155,22.073 25.051,22.968 C146.1@25.44,22.968 ; v1(23.546,34.874) 23.546,33.728 C79.2@23.558,33.716 ; C79.2@23.568,33.706 C79.2@23.558,33.716 ; v1(27.508,23.292) 28.117,23.292 C127.1@28.64,22.768 ; C75.1@29.718,33.147 C75.1@29.729,33.136 ; v1(32.664,51.41) 32.664,50.298 C72.1@32.659,50.293 32.863,50.09 C71.1@32.863,49.119 ; C143.1@36.34,19.518 38.075,21.252 38.075,22.403 38.64,22.968 C147.1@39.14,22.968 ; v1(41.3,23.343) 41.866,23.343 C116.1@42.44,22.768 ; U10.3@41.44,65.043 41.44,64.293 42.39,63.343 42.39,61.893 C27.1@41.64,61.143 C27.1@41.635,61.138 ; C144.1@50.24,19.518 51.841,21.119 51.841,22.073 52.737,22.968 C148.1@53.14,22.968 ; v1(50.597,53.594) 50.876,53.594 U5.A35@51.359,54.077 ; v1(51.156,66.04) 50.521,66.675 50.521,67.005 50.622,67.107 51.874,67.107 U12.4@51.893,67.088 ; C24.1@51.24,64.915 51.24,63.743 U5.A18@51.39,63.593 ; C19.1@63.64,62.593 63.779,62.732 v1(63.779,63.525) ; v1(68.986,23.368) 69.559,23.368 C91.1@70.118,22.808 ; C36.1@70.19,49.143 70.196,49.149 v1(71.501,49.149) ; U6.3@74.66,70.968 U6.3@74.652,70.975 75.725,70.975 v1(75.971,71.222) ; TP48.1@75.692,33.198 C62.1@77.165,33.198 ; C62.1@77.165,33.183 C62.1@77.18,33.183 ; C62.1@77.191,33.172 C62.1@77.18,33.183 ; C134.1@77.486,19.409 79.172,21.095 79.172,21.793 80.338,22.959 C138.1@80.586,22.959 ; C61.2@78.943,33.198 78.928,33.183 C62.1@77.18,33.183 ; C61.2@78.994,33.223 v1(78.994,34.366) ; v4@79.559,66.275 v4(79.629,66.345) ; TP56.1@79.629,67.894 v4(79.629,66.345) ; v4@79.654,66.37 v4(79.629,66.345) ; v1(82.601,23.368) 83.159,23.368 C103.1@83.718,22.808 ; C33.1@83.806,55.88 84.506,55.88 v1(85.166,55.22) ; v1(84.049,33.198) 85.319,33.198 C54.1@85.327,33.189 ; C53.1@85.327,34.36 C54.1@85.327,33.189 ; C49.1@88.14,49.093 C50.1@88.14,50.293 ; C50.1@88.443,50.292 C50.1@88.14,50.293 C50.1@88.14,50.293 ; v1(89.154,51.257) 88.19,50.293 C50.1@88.14,50.293 ; R61.1@90.89,52.343 R59.1@92.39,52.343 ; C135.1@91.587,19.384 93.193,20.989 93.193,22.047 94.058,22.912 94.315,22.912 C139.1@94.362,22.959 ; v1(92.431,53.696) 92.39,53.655 R59.1@92.39,52.343 ; R60.1@93.89,52.343 R59.1@92.39,52.343 ; TP47.1@95.961,71.73 v1(95.987,71.704) ; v1(96.393,23.393) 96.933,23.393 C92.1@97.518,22.808 ; U22.4@99.191,27.297 U22.4@99.212,27.318 ; v1(104.699,45.364) 104.699,46.507 C64.2@104.724,46.533 ; C136.1@105.462,19.395 107.061,20.994 107.061,22.098 108.008,23.045 C140.1@108.262,23.045 ; v1(105.562,49.098) 106.936,49.098 R8.2@106.939,49.101 106.939,50.592 TP53.1@106.909,50.622 ; v1(110.109,23.444) 110.691,23.444 C104.1@111.342,22.794 ; C65.2@111.834,42.875 111.836,42.873 v1(111.836,41.783) ; R7.2@113.22,49.352 114.579,49.352 ; TP57.1@115.57,68.174 115.57,62.814 J1.4@115.59,62.793 ; R99.1@116.572,14.605 v1(118.059,14.605) ; TP46.1@118.999,20.142 v1@120.32,20.142 ; v1(120.345,20.168) R53.2@121.756,20.168 ; 14.326,23.393 14.946,22.773 14.961,22.758 14.326,23.393 ; C62.1@77.165,33.198 77.173,33.19 C62.1@77.18,33.183 ; C62.1@77.165,33.198 C62.1@77.18,33.183 ; C54.1@85.327,33.189 C54.1@85.342,33.174 ; C54.1@85.327,33.189 C54.1@85.342,33.174 ; C54.1@85.342,33.174 85.344,33.172 C54.1@85.342,33.174 ; 114.579,49.352 115.075,49.847 115.087,49.86 114.579,49.352
  Top Layer w0.508: C141.1@8.84,19.518 10.49,21.168 10.49,21.843 C145.1@11.584,22.936 ; v3(8.865,17.653) C141.1@8.865,19.431 ; v1(21.082,42.723) 21.082,41.352 C73.1@21.09,41.343 C74.1@22.39,41.343 ; v4(22.276,45.949) 22.276,44.579 C68.2@22.19,44.493 22.39,44.293 C74.1@22.39,41.343 ; v1(22.454,38.557) 23.576,38.557 C78.1@23.59,38.543 C77.1@24.79,38.543 ; v3(22.555,17.526) C142.1@22.555,19.507 ; R62.2@24.09,41.343 C74.1@22.39,41.343 ; v1(28.575,33.147) C75.1@29.718,33.147 ; C75.1@29.729,33.136 C75.1@29.845,33.136 C76.1@29.845,34.336 ; v1(32.004,64.897) C14.1@32.004,66.599 ; R130.1@33.39,14.618 33.403,14.63 v3(35.154,14.63) 35.166,14.618 R106.1@36.99,14.618 ; U8.7@35.152,67.041 35.202,66.991 R18.2@35.202,65.516 35.23,65.488 v1(35.23,64.16) ; U8.7@35.152,68.516 U8.2@36.552,68.516 ; v1(35.23,53.67) 35.23,52.383 R67.1@35.19,52.343 R66.1@36.69,52.343 ; v3(36.297,17.577) 36.34,17.621 C143.1@36.34,19.518 ; v1(40.183,61.138) C27.1@41.635,61.138 ; v1(40.411,51.308) 40.854,50.865 ; C81.1@41.74,41.393 C84.1@41.74,42.593 ; C15.1@44.49,67.643 44.526,67.607 v1(44.526,66.345) ; C16.1@46.49,67.643 46.49,66.235 v1(46.685,66.04) ; v4(48.641,42.088) 47.296,42.088 C67.2@47.29,42.093 45.969,42.093 45.469,42.593 ; v3(50.216,17.501) 50.24,17.525 C144.1@50.24,19.518 ; v1(59.055,37.465) 59.055,35.179 U1.3@59.09,35.143 ; C34.1@60.54,70.893 61.898,70.893 v1(61.9,70.891) ; R131.1@60.99,14.618 61.003,14.63 v3(62.814,14.63) 62.835,14.609 R72.1@64.76,14.609 ; v3(63.779,17.424) v3@63.91,17.555 ; 63.91,18.415 v3@63.91,17.555 ; C133.1@63.91,19.509 v3@63.91,17.555 ; v4(71.831,67.666) v4@71.704,67.793 ; R82.1@74.76,14.609 76.577,14.609 v3(76.581,14.605) 78.432,14.605 R88.1@78.436,14.609 ; v4(77.013,43.002) 76.39,42.38 C52.1@76.39,41.343 C51.1@77.69,41.343 R56.2@79.19,41.343 ; v3(77.47,17.348) 77.47,19.393 C134.1@77.486,19.409 ; v1(77.724,38.252) 78.881,38.252 C55.1@78.89,38.243 C56.1@80.09,38.243 ; C10.1@77.984,66.275 C10.1@78.152,66.275 ; R98.1@88.336,14.609 88.341,14.605 v3(90.221,14.605) ; v3@90.225,14.609 R74.1@92.212,14.609 ; v3(91.567,17.247) C135.1@91.567,19.364 ; C63.1@97.015,41.301 C63.1@96.84,41.301 C66.1@96.84,42.501 96.941,42.4 C48.1@98.114,42.4 C48.1@98.039,42.4 ; R83.1@102.312,14.609 102.342,14.58 v3(104.013,14.58) 104.028,14.595 R90.1@105.812,14.595 ; v3(105.41,17.399) 105.41,19.343 C136.1@105.462,19.395 ; v1(112.827,40.589) 114.159,40.589 R55.2@114.173,40.576 ; v1(117.45,35.331) 117.45,36.767 C58.1@117.424,36.793 C60.1@119.007,36.793 ; v1@120.32,20.142 v1(120.345,20.168) ; R53.2@121.756,20.168 R53.2@121.781,20.193 ; v1(123.266,34.138) 123.266,36.369 J5.1@123.29,36.393 123.29,38.099 v1(123.85,38.659) ; C14.1@32.004,66.599 31.984,66.619 31.979,66.624 C14.1@32.004,66.599 ; 40.854,50.865 41.885,50.865 R39.1@43.417,50.865 41.917,50.865 40.854,50.865 ; C84.1@41.74,42.593 43.09,42.593 44.29,42.593 45.469,42.593 ; C84.1@41.74,42.593 45.469,42.593 ; v4@71.704,67.793 70.302,67.793 70.282,67.793 v4@71.704,67.793 ; TP60.1@6.464,14.618 8.128,14.618 R104.1@9.971,14.618 TP60.1@6.464,14.618 ; R114.1@19.647,14.618 21.463,14.618 R120.1@23.49,14.618 R114.1@19.647,14.618 ; R115.1@46.89,14.618 48.92,14.618 R122.1@50.89,14.618 R115.1@46.89,14.618 ; 117.932,36.785 117.94,36.793 117.932,36.785
  Top Layer w0.635: R39.1@43.417,50.865 43.419,50.865 R39.1@43.459,50.825 ; C82.2@46.101,48.108 v4(47.498,48.108) ; v1(47.904,56.134) 47.904,55.129 C20.1@47.94,55.093 ; C21.1@49.69,64.343 49.69,65.843 C28.1@49.59,65.943 49.687,66.04 v1(51.156,66.04) 51.156,65 C24.1@51.24,64.915 ; v1(50.597,53.594) 50.64,53.55 50.64,52.393 ; v4(51.791,47.981) C83.2@53.061,47.981 ; C83.2@53.086,48.336 53.165,48.415 C13.1@53.165,50.418 ; v1(53.492,36.855) 54.778,36.855 C1.1@54.79,36.843 C1.1@54.89,36.843 ; TP55.1@56.49,41.021 59.068,41.021 U1.6@59.09,41.043 ; C3.1@58.19,32.943 58.19,33.375 58.445,33.63 58.522,33.63 59.09,34.198 U1.3@59.09,35.143 ; R3.2@63.39,34.743 64.664,34.743 v1(64.668,34.747) TP59.1@65.938,34.747 ; C18.1@64.302,55.397 64.756,54.943 C17.1@64.756,54.051 v1(65.557,54.051) ; U4.2@76.452,65.525 77.133,65.525 77.883,66.275 C10.1@77.984,66.275 ; C46.2@76.99,44.393 77.013,44.371 v4(77.013,43.002) ; C10.1@78.152,66.275 v4@79.559,66.275 ; C48.1@98.114,42.4 C47.1@99.289,42.4 101.583,42.4 C45.2@102.39,41.593 102.885,42.088 v4(103.861,42.088) ; C25.1@50.165,51.918 50.165,51.885 50.165,50.978 C25.1@50.165,51.918 ; C25.1@50.165,51.918 50.259,52.012 50.64,52.393 ; C25.1@50.165,51.918 50.64,52.393 ; C13.1@53.165,50.418 53.327,50.58 53.39,50.643 C13.1@53.165,50.418
  Top Layer w1.27: U1.6@59.09,41.043 59.09,42.606 v3(59.614,43.129) ; C4.2@98.806,51.564 104.29,57.048 U2.1@104.29,59.209
  Bottom Layer w0.152: C44.1@1.18,20.791 C44.1@1.18,21.069 1.18,21.246 C44.1@1.18,21.322 ; v1(61.392,43.383) 61.594,43.181 U18.4@61.594,42.08
  Bottom Layer w0.203: v1(54.204,46.482) 55.352,46.482 C42.1@55.39,46.443 ; U17.4@56.54,43.443 56.54,42.901 57.023,42.418 58.903,42.418 59.116,42.774 v3(59.614,43.129) v3@59.751,43.129 ; v1(64.084,41.529) 64.084,42.809 C43.1@64.11,42.835 ; U14.3@82.04,49.693 82.04,48.058 v1(82.347,47.752)
  Bottom Layer w0.254: U3.5@97.265,61.309 U3.5@97.282,61.326
  Bottom Layer w0.305: C44.1@1.18,20.791 v1(2.134,19.837) 2.388,19.583 TP52.1@3.404,19.583 ; C44.1@1.18,21.246 1.854,21.92 2.057,21.92 2.357,22.22 2.357,23.17 2.159,23.368 U7.2@1.681,23.368 ; C31.1@71.99,56.543 C31.1@72.009,56.562 ; U13.2@75.89,53.893 77.34,53.893 R23.2@77.54,53.693 ; v1(75.997,49.962) 75.997,50.876 76.987,51.867 77.47,51.867 C38.1@77.495,51.892 ; C38.1@77.49,51.843 C38.1@77.54,51.893 ; v1(85.166,55.22) 85.64,54.745 C39.1@85.64,53.79 ; R6.1@91.09,65.359 92.781,65.359 v4(92.812,65.329) 95.225,65.329 95.987,66.091 95.965,66.112 U3.2@95.965,66.909 ; U3.5@97.265,61.309 97.284,61.29 v4(98.704,61.29) ; C9.1@99.64,59.209 99.64,60.354 v4(98.704,61.29) ; R9.2@100.74,63.009 99.021,61.29 v4(98.704,61.29) ; v1@68.758,55.702 68.758,56.718 v1@68.758,55.702 ; v1@68.758,55.702 68.936,55.524 68.986,55.474 v1@68.758,55.702 ; C38.1@77.54,51.893 77.54,53.414 R23.2@77.54,53.693 ; C38.1@77.54,51.893 R23.2@77.54,53.693
  Bottom Layer w0.508: v1@68.986,55.474 70.056,56.543 70.49,56.543 71.99,56.543 72.267,56.82 C30.1@74.088,56.82 ; C39.1@85.64,53.79 85.64,52.193 C37.1@86.29,51.543 R22.2@87.89,51.543 ; R5.1@91.04,62.609 91.09,62.659 C8.1@93.09,62.659 ; R1.2@101.067,67.019 101.067,65.964 104.292,62.738 104.292,59.211 U2.1@104.29,59.209 ; v1(115.087,49.835) 115.087,51.24 C35.1@115.09,51.243 ; J4.4@118.69,49.143 119.679,49.143 C29.1@120.74,48.082 ; C30.1@74.088,56.82 74.14,56.768 C30.1@74.088,56.82
  Bottom Layer w0.635: C8.1@93.09,62.659 94.46,62.659 v4(94.64,62.84) ; C7.1@108.29,69.493 108.84,70.043 C6.1@110.475,70.043 ; C6.1@110.465,70.053 C6.1@110.475,70.043 ; C6.1@110.49,70.043 C6.1@110.475,70.043 ; C5.1@115.54,66.493 115.54,62.843 J1.4@115.59,62.793 ; C6.1@110.475,70.043 110.483,70.035 C6.1@110.49,70.028 ; C6.1@110.475,70.043 C6.1@110.49,70.028 ; C6.1@110.49,70.028 v4(112.039,70.028) C6.1@110.49,70.028
  Bottom Layer w1.27: TP45.1@59.116,40.462 v3@59.116,42.774
  other v1: 113.055,28.651 68.885,55.474 28.245,59.03
  other v2: 68.785,25.809 69.685,25.809 13.79,25.843 14.69,25.843 27.49,25.843 28.39,25.843 41.09,25.843 41.99,25.843 55.09,25.843 55.99,25.843 82.568,25.82 83.468,25.82 96.341,25.847 97.241,25.847 110.212,25.92 111.112,25.92 68.785,26.759 69.685,26.759 82.568,26.77 83.468,26.77 13.79,26.793 14.69,26.793 27.49,26.793 28.39,26.793 41.09,26.793 41.99,26.793 55.09,26.793 55.99,26.793 96.341,26.797 97.241,26.797 110.212,26.87 111.112,26.87
  other v3: 21.463,14.605 8.128,14.63 48.92,14.63
  other v4: 65.278,68.174
  other v5: 77.581,56.118 78.781,56.118 77.581,57.318 78.781,57.318
  other v6: 85.42,28.55
I2C_SCL: R57.1 R64.1 TP29.1 U5.A50 U15.9 U19.63 U20.63 | length 77.2
  Top Layer w0.152: R64.1@41.69,46.743 42.645,46.743 44.629,48.726 44.629,50.546 45.34,51.257 45.974,51.257 46.253,50.978 v1(47.879,50.978) ; v1(58.496,51.054) 59.263,51.054 59.34,50.977 ; U5.A50@59.334,54.037 U5.A50@59.385,54.088 ; U5.A50@59.39,54.093 U5.A50@59.385,54.088 ; U19.63@93.065,45.043 93.024,45.085 83.015,45.085 81.278,46.822 78.789,46.822 78.527,46.56 74.737,46.56 72.034,49.262 72.034,49.37 71.381,50.023 69.713,50.023 69.543,50.193 U15.9@68.515,50.193 67.739,50.193 66.61,51.322 62.232,51.322 61.753,50.843 61.189,50.843 61.029,51.003 60.587,51.003 60.426,50.843 59.474,50.843 59.34,50.977 ; R57.1@95.187,44.526 96,43.713 97.638,43.713 97.993,43.713 98.933,44.653 98.933,46.863 TP29.1@98.704,47.092 ; 59.34,50.977 59.34,53.403 59.334,53.409 59.334,53.772 59.385,53.823 U5.A50@59.385,54.088
  Top Layer w0.203: U20.63@37.965,45.043 U20.63@37.982,45.06 ; U20.63@37.982,45.034 40.056,45.034 ; 40.056,45.06 41.69,46.694 R64.1@41.69,46.743 ; U19.63@93.065,45.043 93.793,45.043 94.285,44.552 95.162,44.552 R57.1@95.187,44.526
  Bottom Layer w0.152: v1(47.879,50.978) 52.309,50.978 53.604,52.273 55.293,52.273 55.718,52.697 57.339,52.697 58.42,51.617 ; v1(58.496,51.054) v1@58.42,50.978 ; v1@58.42,50.978 58.42,51.054 58.42,51.617 ; v1@58.42,50.978 58.42,51.617
I2C_SDA: R58.1 R65.1 TP30.1 U5.A49 U15.10 U19.64 U20.64 | length 69.4
  Top Layer w0.152: R65.1@40.19,46.743 40.317,46.743 41.239,47.665 43.136,47.665 44.324,48.853 44.324,50.672 45.214,51.562 46.939,51.562 v1(46.965,51.537) ; v1(58.801,53.111) 58.89,53.201 U5.A49@58.89,54.093 ; v1(61.57,52.436) 61.57,52.378 61.531,52.339 61.531,52.218 62.122,51.627 66.773,51.627 67.707,50.693 U15.10@68.515,50.693 69.474,50.693 69.839,50.328 71.507,50.328 ; TP30.1@72.517,50.495 71.674,50.495 71.507,50.328 ; U19.64@93.065,45.543 82.988,45.543 81.405,47.127 78.662,47.127 78.4,46.865 74.863,46.865 72.339,49.389 72.339,49.496 71.507,50.328
  Top Layer w0.203: U20.64@37.965,45.543 38.99,45.543 R65.1@40.19,46.743 ; U19.64@93.065,45.543 93.956,45.543 94.463,46.05 R58.1@95.199,46.05
  Bottom Layer w0.152: v1(46.965,51.537) 49.962,51.537 50.16,51.735 50.16,52.919 50.294,53.053 50.81,53.053 51.58,53.823 52.875,53.823 53.205,53.492 53.696,53.492 53.696,53.416 54.127,52.984 54.508,52.603 55.187,52.603 55.695,53.111 v1(58.801,53.111) 59.614,52.299 60.537,52.299 60.613,52.375 61.011,52.375 61.087,52.451 61.554,52.451 v1(61.57,52.436) 61.57,52.378 61.541,52.349 v1@61.519,52.349
LED_GEN: D3.1 U5.B18 | length 22.8
  Top Layer w0.152: U5.B18@52.14,60.593 52.784,60.593 54.102,59.275 54.102,57.861 53.67,57.429 ; v1(53.289,57.353) 53.289,57.379 v1@53.238,57.429 ; v1@53.238,57.429 53.231,57.437 53.225,57.437 53.233,57.429 v1@53.238,57.429 ; v1@53.238,57.429 53.289,57.429 53.67,57.429 ; v1@53.238,57.429 53.67,57.429
  Top Layer w0.254: v1(40.488,56.032) 41.859,56.032 41.885,56.032 v1(40.488,56.032)
  Bottom Layer w0.152: v1(40.488,56.032) 41.986,57.531 50.106,57.531 51.249,56.388 52.578,56.388 53.315,57.125 53.315,57.175 53.238,57.252 53.238,57.302 v1(53.289,57.353)
LED_SMP: D4.1 U5.B19 | length 19
  Top Layer w0.152: v1@44.624,56.054 v1@44.628,56.058 ; U5.B19@52.14,60.093 52.853,60.093 53.797,59.149 53.797,57.987 53.616,57.806 53.536,57.887 53.028,57.887 52.875,57.734 52.875,57.701 52.756,57.582 52.756,57.032 52.824,56.964 52.824,56.895 53.467,56.252 v1(53.467,56.096)
  Top Layer w0.254: D4.1@43.434,56.054 44.602,56.054 44.624,56.054 D4.1@43.434,56.054
  Bottom Layer w0.152: v1(44.602,56.058) 45.771,57.226 49.98,57.226 50.876,56.33 50.876,56.076 51.173,55.778 53.365,55.778 53.467,55.88 v1(53.467,56.096)